# EAGLE board Teensy (EAGLE 9.4.2)
REV: A
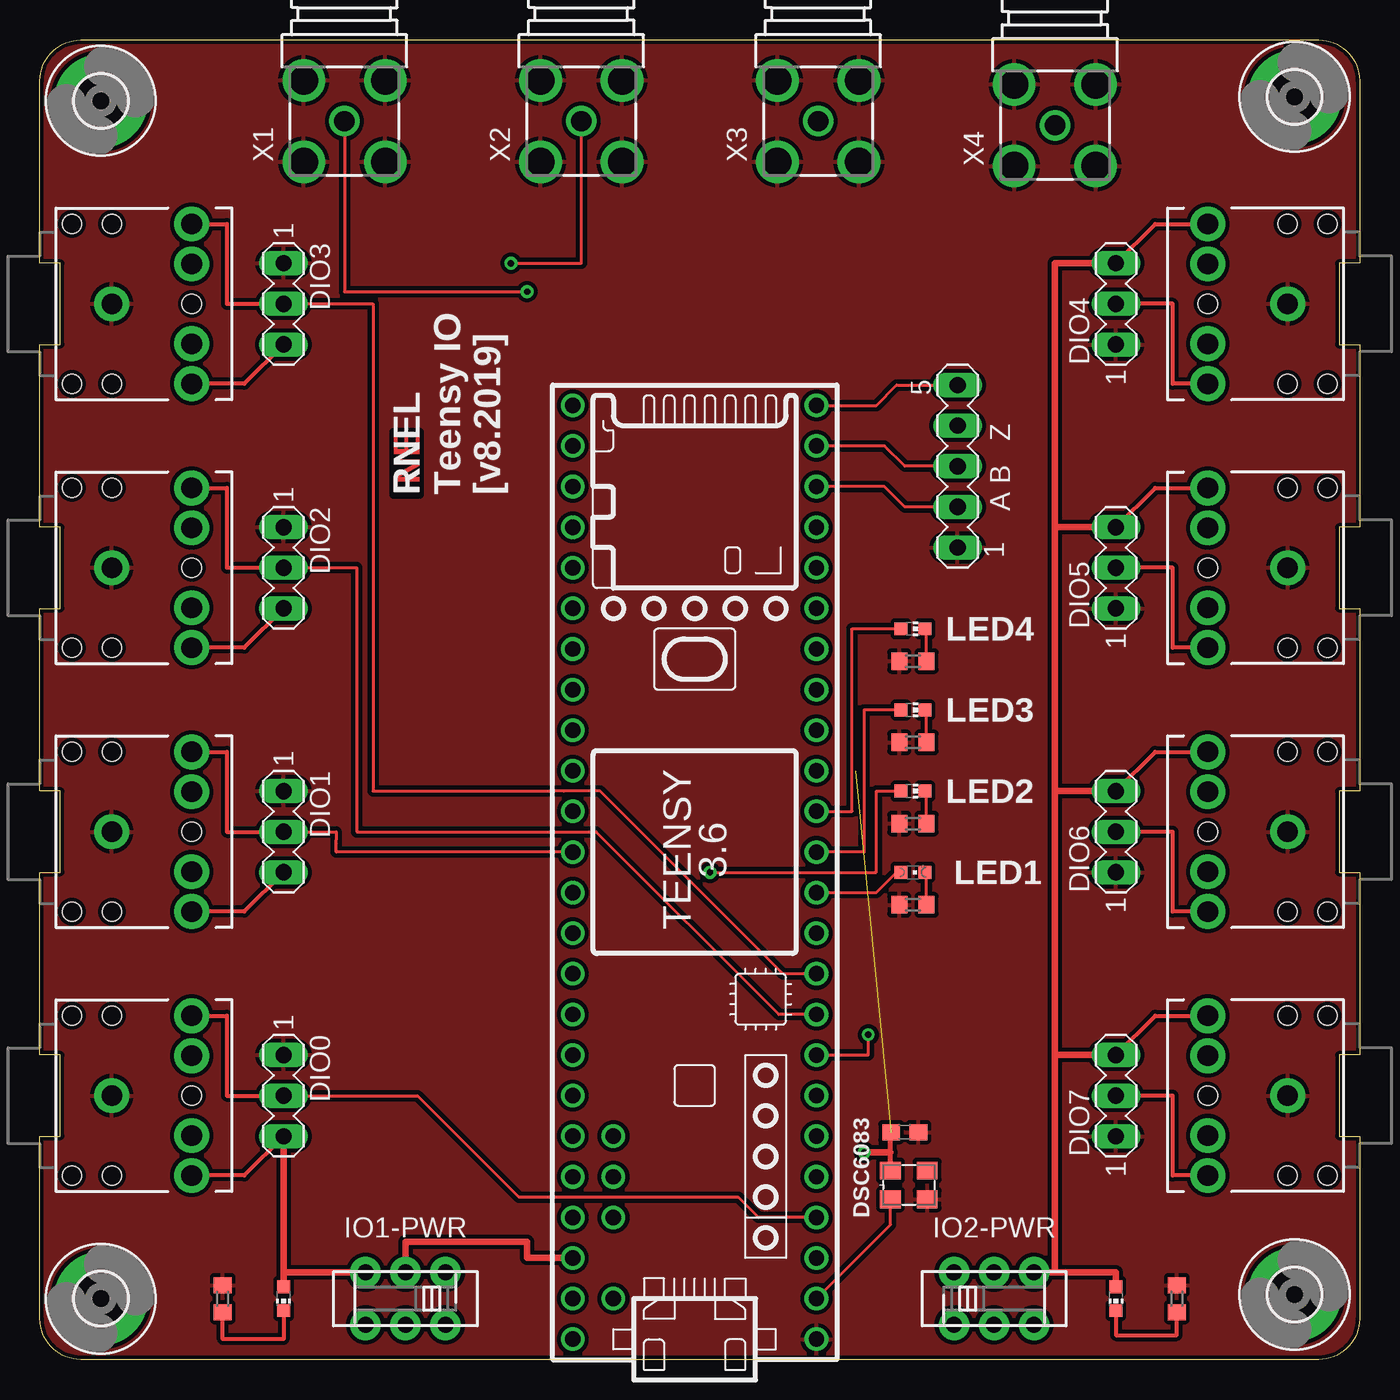
[diagram p0: board, top side]
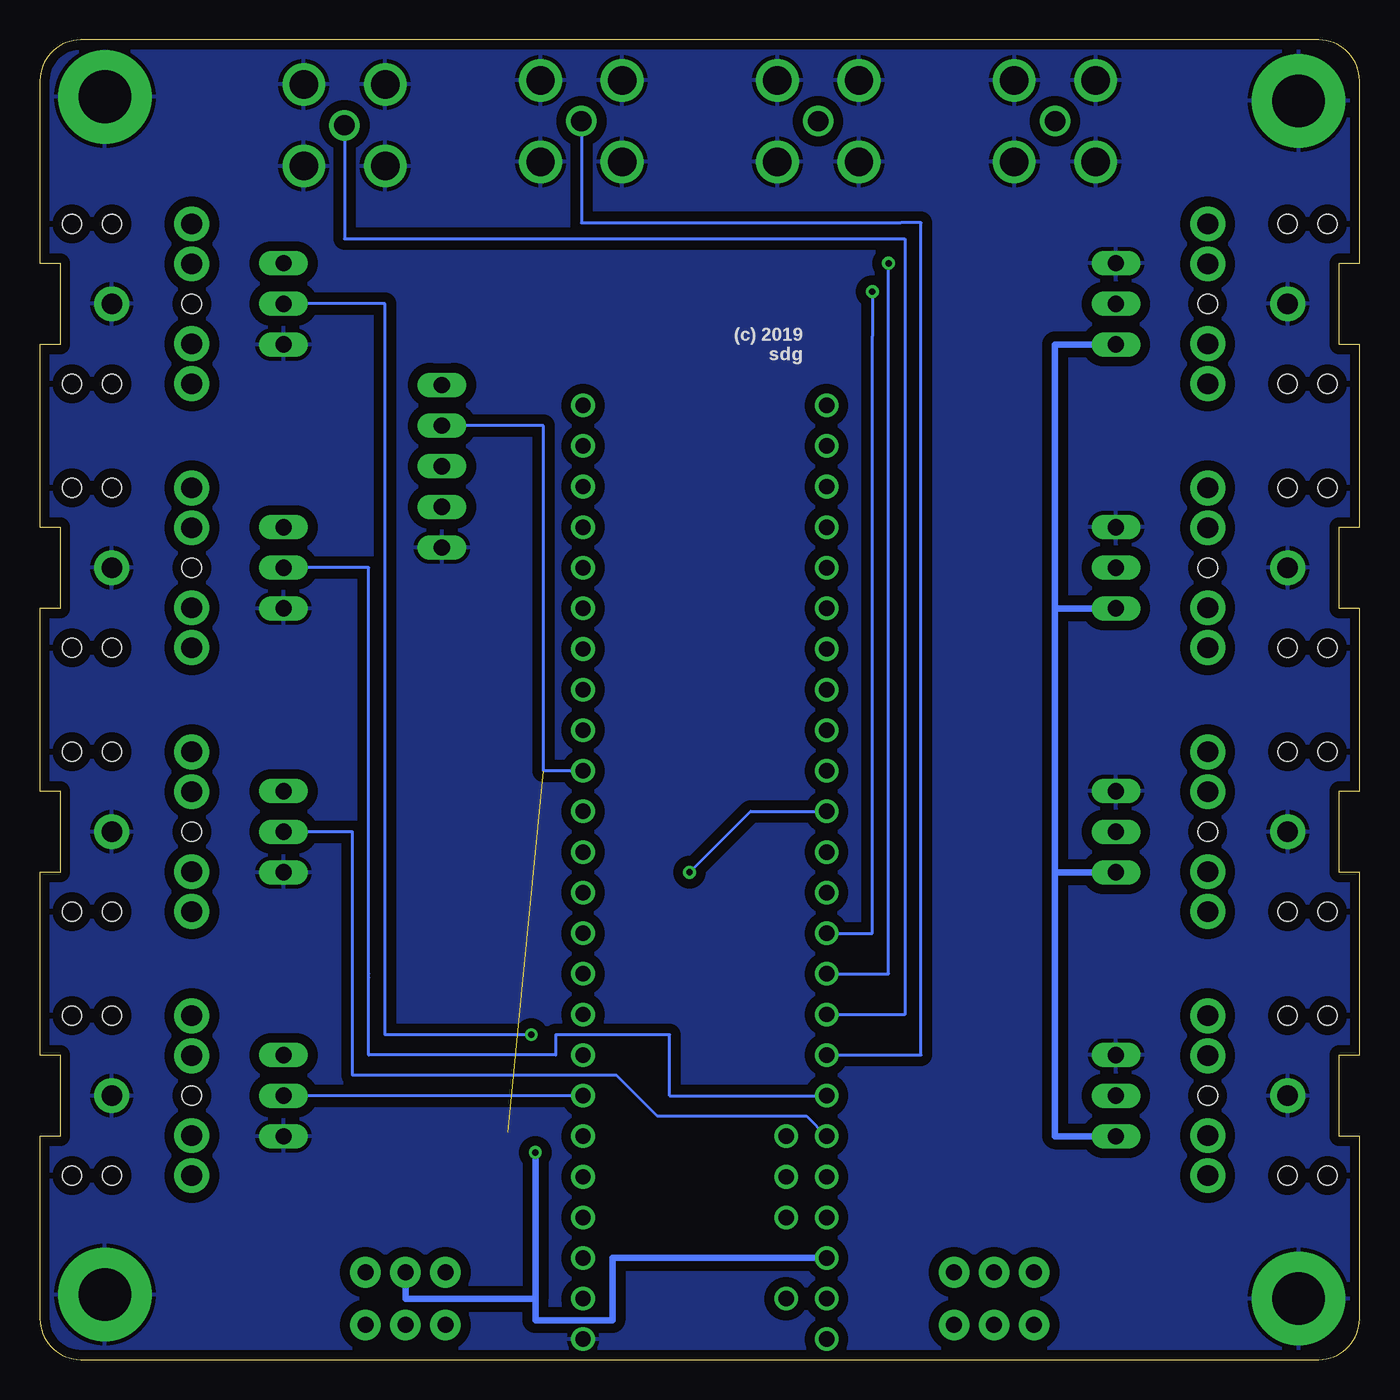
[diagram p1: board, bottom side, seen from below]

Size 82.55 x 82.55 mm. Coordinates in mm from the lower left corner, seen from the top.
Outline: 82.55,80.01 82.55,68.58 81.28,68.58 81.28,63.5 82.55,63.5 82.55,52.07 81.28,52.07 81.28,46.99 82.55,46.99 82.55,35.56 81.28,35.56 81.28,30.48 82.55,30.48 82.55,19.05 81.28,19.05 81.28,13.97 82.55,13.97 82.55,2.54 arc-90 80.01,0 2.54,0 arc-90 0,2.54 0,13.97 1.27,13.97 1.27,19.05 0,19.05 0,30.48 1.27,30.48 1.27,35.56 0,35.56 0,46.99 1.27,46.99 1.27,52.07 0,52.07 0,63.5 1.27,63.5 1.27,68.58 0,68.58 0,80.01 arc-90 2.54,82.55 80.01,82.55 arc-90 82.55,80.01
Copper layers (1*16): Top 0.035mm / dielectric 1.5mm / Bottom 0.035mm
Design rules "adafruit *": minimum track width 8mil, minimum drill 15.5mil, track to track 8mil, track to pad 8mil, pad to pad 8mil, via to via 8mil, smd to smd 8mil, copper to edge 10mil, drill to drill 8mil, minimum pad ring 10mil, minimum via ring 8mil, stop-mask expansion 2mil, vias tented up to drill 20mil, thermal gap 10mil
Net classes: 0 default: clearance 0.205 mm

## Footprints (pad centres in the part's own frame; a part is rotated, then mirrored left to right if it is on the bottom)
MA05-1 = drill 1.016 long: 1 -5.08,0; 2 -2.54,0; 3 0,0; 4 2.54,0; 5 5.08,0
C0603 = smd 1.1 x 1: 1 -0.85,0; 2 0.85,0
MA03-1 = drill 1.016 long: 1 -2.54,0; 2 0,0; 3 2.54,0
3.2X2.5_KXO-V96 = smd 1.3 x 1.1: 1 -1.15,-0.9; 2 1.15,-0.9; 3 1.15,0.9; 4 -1.15,0.9
3,3-PAD = drill 3.3 pad 5.842: B3,3 0,0
CHIP-LED0603 = smd 0.8 x 0.8: A 0,-0.75; C 0,0.75
AUDIO-JACK = drill 1.3 pad 2.184: RING 5,5; RSH 5,2.5; SLEEVE 0,0; TIP 5,-5; TSH 5,-2.5 | hole 1.2: 0,5; -2.5,5; -2.5,-5; 0,-5; 5,0
CHIPLED_0603 = smd 0.8 x 0.8: A 0,-0.75; C 0,0.75
R0603 = smd 1 x 1.1: 1 -0.85,0; 2 0.85,0
JS_DPDT_TH = drill 1 pad 1.93: 1 -2.5,-1.65; 2 0,-1.65; 3 2.5,-1.65; 4 -2.5,1.65; 5 0,1.65; 6 2.5,1.65
TEENSY_3.5/3.6_BASIC = drill 0.965: 0/RX -25.4,-7.62; 1/TX -22.86,-7.62; 2 -20.32,-7.62; 3/CANTX -17.78,-7.62; 3V3 7.62,-7.62; 3V3_LO -22.86,7.62; 4/CANRX -15.24,-7.62; 5 -12.7,-7.62; 6 -10.16,-7.62; 7 -7.62,-7.62; 8 -5.08,-7.62; 9/CS -2.54,-7.62; 10/CS 0,-7.62; 11/MOSI 2.54,-7.62; 12/MISO 5.08,-7.62; 13/SCK 5.08,7.62; 14/A0 2.54,7.62; 15/A1 0,7.62; 16/A2 -2.54,7.62; 17/A3 -5.08,7.62; 18/A4/SDA -7.62,7.62; 19/A5/SCL -10.16,7.62; 20/A6 -12.7,7.62; 21/A7 -15.24,7.62; 21/DAC0 12.7,7.62; 22/A8 -17.78,7.62; 23/A9 -20.32,7.62; 24 10.16,-7.62; 25 12.7,-7.62; 26 15.24,-7.62; 27 17.78,-7.62; 28 20.32,-7.62; 29 22.86,-7.62; 30 25.4,-7.62; 31/A12 27.94,-7.62; 32/A13 30.48,-7.62; 33/A14 30.48,7.62; 34/A15 27.94,7.62; 35/A16 25.4,7.62; 36/A17 22.86,7.62; 37/A18 20.32,7.62; 38/A19 17.78,7.62; 39/A20 15.24,7.62; A10 -17.78,5.08; A11 -15.24,5.08; A22/DAC1 10.16,7.62; AGND -25.4,7.62; AREF -20.32,5.08; GND -27.94,-7.62; GND2 7.62,7.62; VIN -27.94,7.62; VUSB -25.4,5.08
BU-SMA-G = drill 1.27: 1 0,0 | drill 1.778: 2 -2.55,2.55; 3 2.55,2.55; 4 2.55,-2.55; 5 -2.55,-2.55

## Placement (x,y rotation side)
AMT102  [MA05-1]  57.4,55.88 90 top
C  0.1uF  [C0603]  54.1,14.22 0 top
DIO0  [MA03-1]  15.24,16.51 270 top
DIO1  [MA03-1]  15.24,33.02 270 top
DIO2  [MA03-1]  15.24,49.53 270 top
DIO3  [MA03-1]  15.24,66.04 270 top
DIO4  [MA03-1]  67.31,66.04 90 top
DIO5  [MA03-1]  67.31,49.53 90 top
DIO6  [MA03-1]  67.31,33.02 90 top
DIO7  [MA03-1]  67.31,16.51 90 top
DSC6083  2KHZ  [3.2X2.5_KXO-V96]  54.36,10.92 0 top
H1  MOUNT-PAD-ROUND3.3  [3,3-PAD]  3.81,3.81 0 top
H2  MOUNT-PAD-ROUND3.3  [3,3-PAD]  3.81,78.74 0 top
H3  MOUNT-PAD-ROUND3.3  [3,3-PAD]  78.49,78.99 0 top
H4  MOUNT-PAD-ROUND3.3  [3,3-PAD]  78.49,4.06 0 top
IO1-PWR  [CHIP-LED0603]  15.24,3.81 180 top
IO2-PWR  [CHIP-LED0603]  67.31,3.81 180 top
J1  AUDIO_JACK_3.5MM_PTH  [AUDIO-JACK]  4.5,16.51 0 top
J2  AUDIO_JACK_3.5MM_PTH  [AUDIO-JACK]  4.5,33.02 0 top
J3  AUDIO_JACK_3.5MM_PTH  [AUDIO-JACK]  4.5,49.53 0 top
J4  AUDIO_JACK_3.5MM_PTH  [AUDIO-JACK]  4.5,66.04 0 top
J5  AUDIO_JACK_3.5MM_PTH  [AUDIO-JACK]  78.05,66.04 180 top
J6  AUDIO_JACK_3.5MM_PTH  [AUDIO-JACK]  78.05,49.53 180 top
J7  AUDIO_JACK_3.5MM_PTH  [AUDIO-JACK]  78.05,33.02 180 top
J8  AUDIO_JACK_3.5MM_PTH  [AUDIO-JACK]  78.05,16.51 180 top
LED1  [CHIPLED_0603]  54.61,30.48 270 top
LED2  [CHIP-LED0603]  54.61,35.56 270 top
LED3  [CHIP-LED0603]  54.61,40.64 270 top
LED4  [CHIP-LED0603]  54.61,45.72 270 top
R1  R  [R0603]  54.61,28.45 180 top
R2  R  [R0603]  54.61,33.53 180 top
R3  R  [R0603]  71.12,3.81 90 top
R4  R  [R0603]  11.43,3.81 90 top
R5  R  [R0603]  54.61,38.61 180 top
R6  R  [R0603]  54.61,43.69 180 top
U$1  SWITCH_DPDT  [JS_DPDT_TH]  59.69,3.81 0 top
U$2  SWITCH_DPDT  [JS_DPDT_TH]  22.86,3.81 180 top
U$3  TEENSY_3.5/3.6_BASIC  [TEENSY_3.5/3.6_BASIC]  40.96,29.21 90 top
X1  BU-SMA-G  [BU-SMA-G]  19.05,77.47 90 top
X2  BU-SMA-G  [BU-SMA-G]  33.87,77.47 90 top
X3  BU-SMA-G  [BU-SMA-G]  48.68,77.47 90 top
X4  BU-SMA-G  [BU-SMA-G]  63.5,77.22 90 top

## Library data of the parts
AMT102 = con-lstb-mod; OC_FARNELL: unknown; OC_NEWARK: unknown
C = rcl; SPICEPREFIX: C
DIO0 DIO1-DIO7 = con-lstb; OC_FARNELL: unknown; OC_NEWARK: unknown
DSC6083 = crystal-geyer_V1_0
H1-H4 = holes
IO1-PWR IO2-PWR LED1-LED4 = led
J1-J8 = SparkFun-Connectors; PROD_ID: CONN-08774; SF_ID: PRT-08032
R1-R6 = rcl; SPICEPREFIX: R
U$1 U$2 = ELEC327
U$3 = Teensy356
X1-X4 = con-coax; OC_FARNELL: unknown; OC_NEWARK: unknown

## Nets
BDIO0: U$3.16/A2 X1.1
BDIO1: U$3.17/A3 X2.1
BDIO2: U$3.19/A5/SCL X3.1
BDIO3: U$3.18/A4/SDA X4.1
D0: DIO0.2 J1.RING U$3.2
D1: DIO1.2 J2.RING U$3.14/A0
D2: DIO2.2 J3.RING U$3.7
D3: DIO3.2 J4.RING U$3.8
D4: DIO4.2 J5.RING U$3.6
D5: DIO5.2 J6.RING U$3.20/A6
D6: DIO6.2 J7.RING U$3.21/A7
D7: DIO7.2 J8.RING U$3.5
EXT_CLK: DSC6083.1 U$3.0/RX
GND: AMT102.1 C.2 DIO0.1 DIO1.1 DIO2.1 DIO3.1 DIO4.1 DIO5.1 DIO6.1 DIO7.1 DSC6083.2 H1.B3,3 H2.B3,3 H3.B3,3 H4.B3,3 J1.SLEEVE J2.SLEEVE J3.SLEEVE J4.SLEEVE J5.SLEEVE J6.SLEEVE J7.SLEEVE J8.SLEEVE R1.2 R2.2 R3.2 R4.2 R5.2 R6.2 U$3.GND X1.2 X1.3 X1.4 X1.5 X2.2 X2.3 X2.4 X2.5 X3.2 X3.3 X3.4 X3.5 X4.2 X4.3 X4.4 X4.5
LED0: LED1.A U$3.10/CS
LED1: LED2.A U$3.13/SCK
LED2: LED3.A U$3.11/MOSI
LED3: LED4.A U$3.12/MISO
N$1: LED1.C R1.1
N$2: LED2.C R2.1
N$3: IO2-PWR.C R3.1
N$4: IO1-PWR.C R4.1
N$5: LED3.C R5.1
N$6: LED4.C R6.1
QUADA: AMT102.3 U$3.31/A12
QUADB: AMT102.5 U$3.32/A13
QUADZ: AMT102.2 U$3.30
VCC-SWITCHED-1: DIO0.3 DIO1.3 DIO2.3 DIO3.3 IO1-PWR.A J1.TIP J2.TIP J3.TIP J4.TIP U$2.3
VCC-SWITCHED-2: DIO4.3 DIO5.3 DIO6.3 DIO7.3 IO2-PWR.A J5.TIP J6.TIP J7.TIP J8.TIP U$1.6
VDD: AMT102.4 C.1 DSC6083.4 U$1.5 U$2.2 U$3.3V3 U$3.3V3_LO

## Tracks (layer width: path | path; a pad name or v marks a point on that pad's centre or on a via)
BDIO0  (via drill 0.39)
  Top 0.203: v30.48,66.8 19.05,66.8 X1.1
  Bottom 0.203: U$3.16/A2 30.48,26.67 30.48,63.75 30.48,64.01 v30.48,66.8
BDIO1  (via drill 0.39)
  Top 0.203: X2.1 33.87,68.58 v29.46,68.58
  Bottom 0.203: U$3.17/A3 29.46,24.13 v29.46,68.58
BDIO2
  Bottom 0.203: U$3.19/A5/SCL 27.43,19.05 27.43,71.12 28.7,71.12 48.68,71.12 X3.1
BDIO3
  Bottom 0.203: U$3.18/A4/SDA 28.45,21.59 28.45,70.1 63.5,70.1 X4.1
D0
  Top 0.203: DIO0.2 23.62,16.51 29.97,10.16 43.69,10.16 44.96,8.89 U$3.2
  Top 0.254: J1.RING 11.68,21.51 11.68,16.51 DIO0.2
D1
  Top 0.203: U$3.14/A0 18.54,31.75 18.54,32.26 18.54,32.51 18.54,33.02 DIO1.2
  Top 0.254: J2.RING 11.68,38.02 11.68,33.02 DIO1.2
D2
  Top 0.203: U$3.7 46.23,21.59 34.8,33.02 19.81,33.02 19.81,49.53 DIO2.2
  Top 0.254: J3.RING 11.68,54.53 11.68,49.53 DIO2.2
D3
  Top 0.203: U$3.8 46.48,24.13 35.05,35.56 32.77,35.56 32,35.56 20.83,35.56 20.83,66.04 DIO3.2
  Top 0.254: J4.RING 11.68,71.04 11.68,66.04 DIO3.2
D4  (via drill 0.39)
  Top 0.203: U$3.6 51.82,19.05 v51.82,20.32
  Top 0.254: DIO4.2 70.87,66.04 70.87,61.04 J5.RING
  Bottom 0.203: v51.82,20.32 60.96,20.32 60.96,66.04 DIO4.2
D5
  Top 0.254: DIO5.2 70.87,49.53 70.87,44.53 J6.RING
  Bottom 0.203: U$3.20/A6 43.17,16.51 43.17,20.32 50.29,20.32 50.29,19.05 61.98,19.05 61.98,23.88 61.98,24.13 61.98,49.53 DIO5.2
D6
  Top 0.254: DIO6.2 70.87,33.02 70.87,28.02 J7.RING
  Bottom 0.203: U$3.21/A7 34.61,15.24 43.94,15.24 46.48,17.78 62.99,17.78 62.99,33.02 DIO6.2
D7
  Top 0.254: DIO7.2 70.87,16.51 70.87,11.51 J8.RING
  Bottom 0.203: U$3.5 DIO7.2
EXT_CLK
  Top 0.203: U$3.0/RX 53.21,8.44 DSC6083.1
GND
  pour Top (isolate 0.254): 0,-0.25 0,82.55 82.55,82.55 82.55,0
  pour Bottom (isolate 0.61): 0,82.55 82.55,82.55 82.55,0 0,0
LED0
  Top 0.203: U$3.10/CS 52.32,29.21 53.59,30.48 LED1.A
LED1  (via drill 0.39)
  Top 0.203: v41.91,30.48 52.32,30.48 52.32,35.56 LED2.A
  Bottom 0.203: U$3.13/SCK 38.1,34.29 v41.91,30.48
LED2
  Top 0.203: LED3.A 51.56,40.64 51.56,31.75 U$3.11/MOSI
LED3
  Top 0.203: U$3.12/MISO 50.8,34.29 50.8,45.72 LED4.A
N$1
  Top 0.203: R1.1 55.46,30.48 LED1.C
N$2
  Top 0.203: R2.1 55.46,35.56 LED2.C
N$3
  Top 0.254: IO2-PWR.C 67.31,1.52 71.12,1.52 R3.1
N$4
  Top 0.254: IO1-PWR.C 15.24,1.27 11.43,1.27 R4.1
N$5
  Top 0.203: R5.1 55.46,40.64 LED3.C
N$6
  Top 0.203: R6.1 55.46,45.72 LED4.C
QUADA
  Top 0.203: AMT102.3 54.1,55.88 52.83,57.15 U$3.31/A12
QUADB
  Top 0.203: U$3.32/A13 52.32,59.69 53.59,60.96 AMT102.5
QUADZ
  Top 0.203: AMT102.2 54.1,53.34 52.83,54.61 U$3.30
VCC-SWITCHED-1
  Top 0.254: DIO0.3 12.78,11.51 J1.TIP | DIO1.3 12.78,28.02 J2.TIP | DIO2.3 12.78,44.53 J3.TIP | DIO3.3 12.78,61.04 J4.TIP
  Top 0.406: DIO0.3 15.24,5.59 15.24,5.46 | 15.24,5.46 IO1-PWR.A | U$2.3 15.24,5.46
  Bottom 0.406: DIO3.3 19.05,63.5 19.05,49.53 19.05,46.99 | DIO2.3 19.05,46.99 | 19.05,46.99 19.05,30.48 | DIO1.3 19.05,30.48 | DIO0.3 19.05,13.97 19.05,30.48
VCC-SWITCHED-2
  Top 0.254: DIO4.3 69.77,71.04 J5.TIP | DIO5.3 69.77,54.53 J6.TIP | DIO6.3 69.77,38.02 J7.TIP | DIO7.3 69.77,21.51 J8.TIP
  Top 0.406: DIO7.3 63.5,19.05 | 63.5,35.56 63.5,19.05 | DIO6.3 63.5,35.56 | 63.5,35.56 63.5,52.07 | DIO5.3 63.5,52.07 | DIO4.3 63.5,68.58 63.5,52.07 | 63.5,19.05 63.5,5.46 | IO2-PWR.A 67.31,5.46 64.26,5.46 63.5,5.46 | 63.5,5.46 U$1.6
VDD  (via drill 0.39)  (1 unrouted)
  Top 0.305: DSC6083.4 53.21,12.95 53.21,14.22 C.1
  Top 0.406: U$2.2 22.86,7.37 30.48,7.37 30.48,6.35 U$3.3V3_LO | 53.21,12.95 v51.56,12.95
  Bottom 0.203: U$3.3V3 51.05,36.83 51.05,58.42 AMT102.4
  Bottom 0.406: U$3.3V3_LO 46.74,6.35 46.74,2.47 51.56,2.47 51.56,3.81 | U$1.5 59.69,3.81 51.56,3.81 | v51.56,12.95 51.56,3.81

## Text on the board
Top: NE
tPlace: RNEL / Teensy IO / [v8.2019]
bPlace: (c) 2019 / sdg
tNames: A B Z
tStop: NE